# Altium PCB WX sat filter.PcbDoc
Units mm, origin at the board's own origin, x right, y up, seen from the top; angles counter-clockwise.
Board outline 18 x 18 mm, 2 copper layers (Top Layer, Bottom Layer); 7 components, 5 nets, 14 pads, 4 vias.
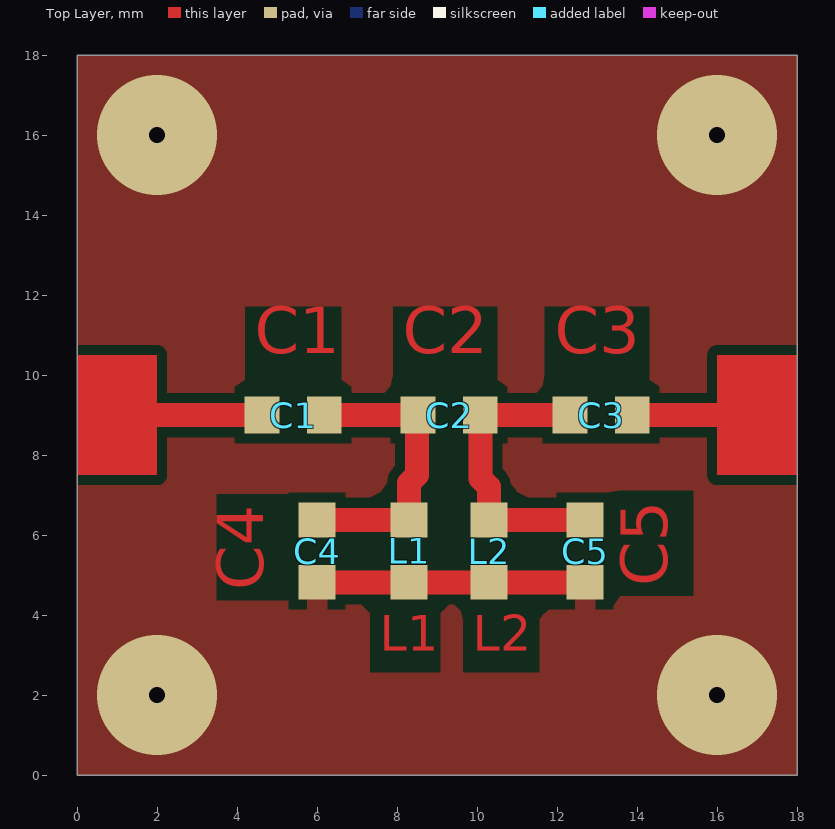
[diagram p0: Top Layer view]
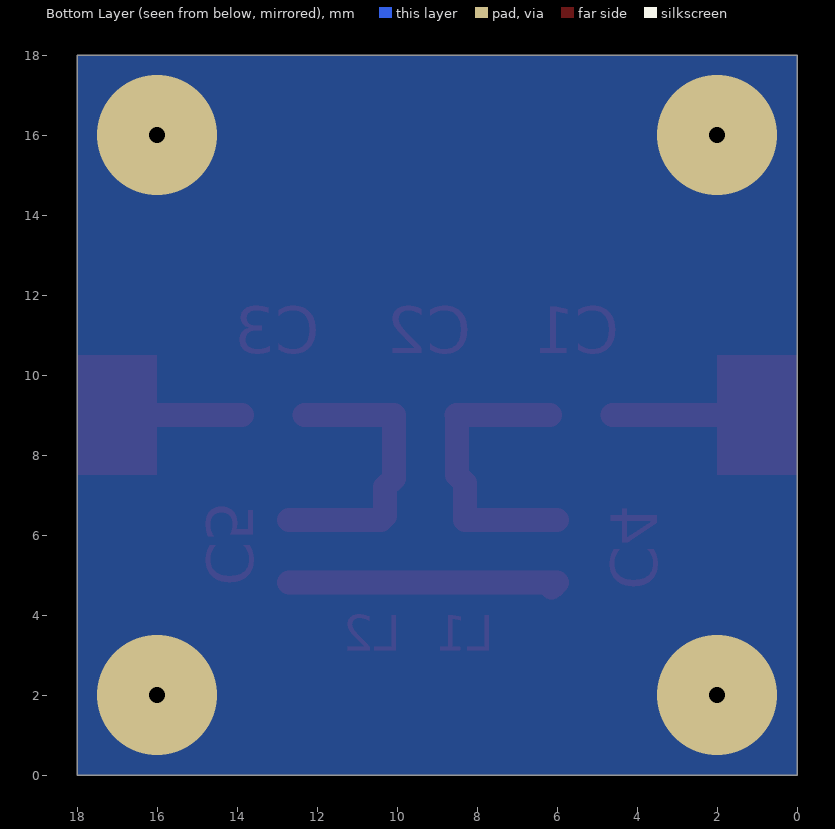
[diagram p1: Bottom Layer view, seen from below]
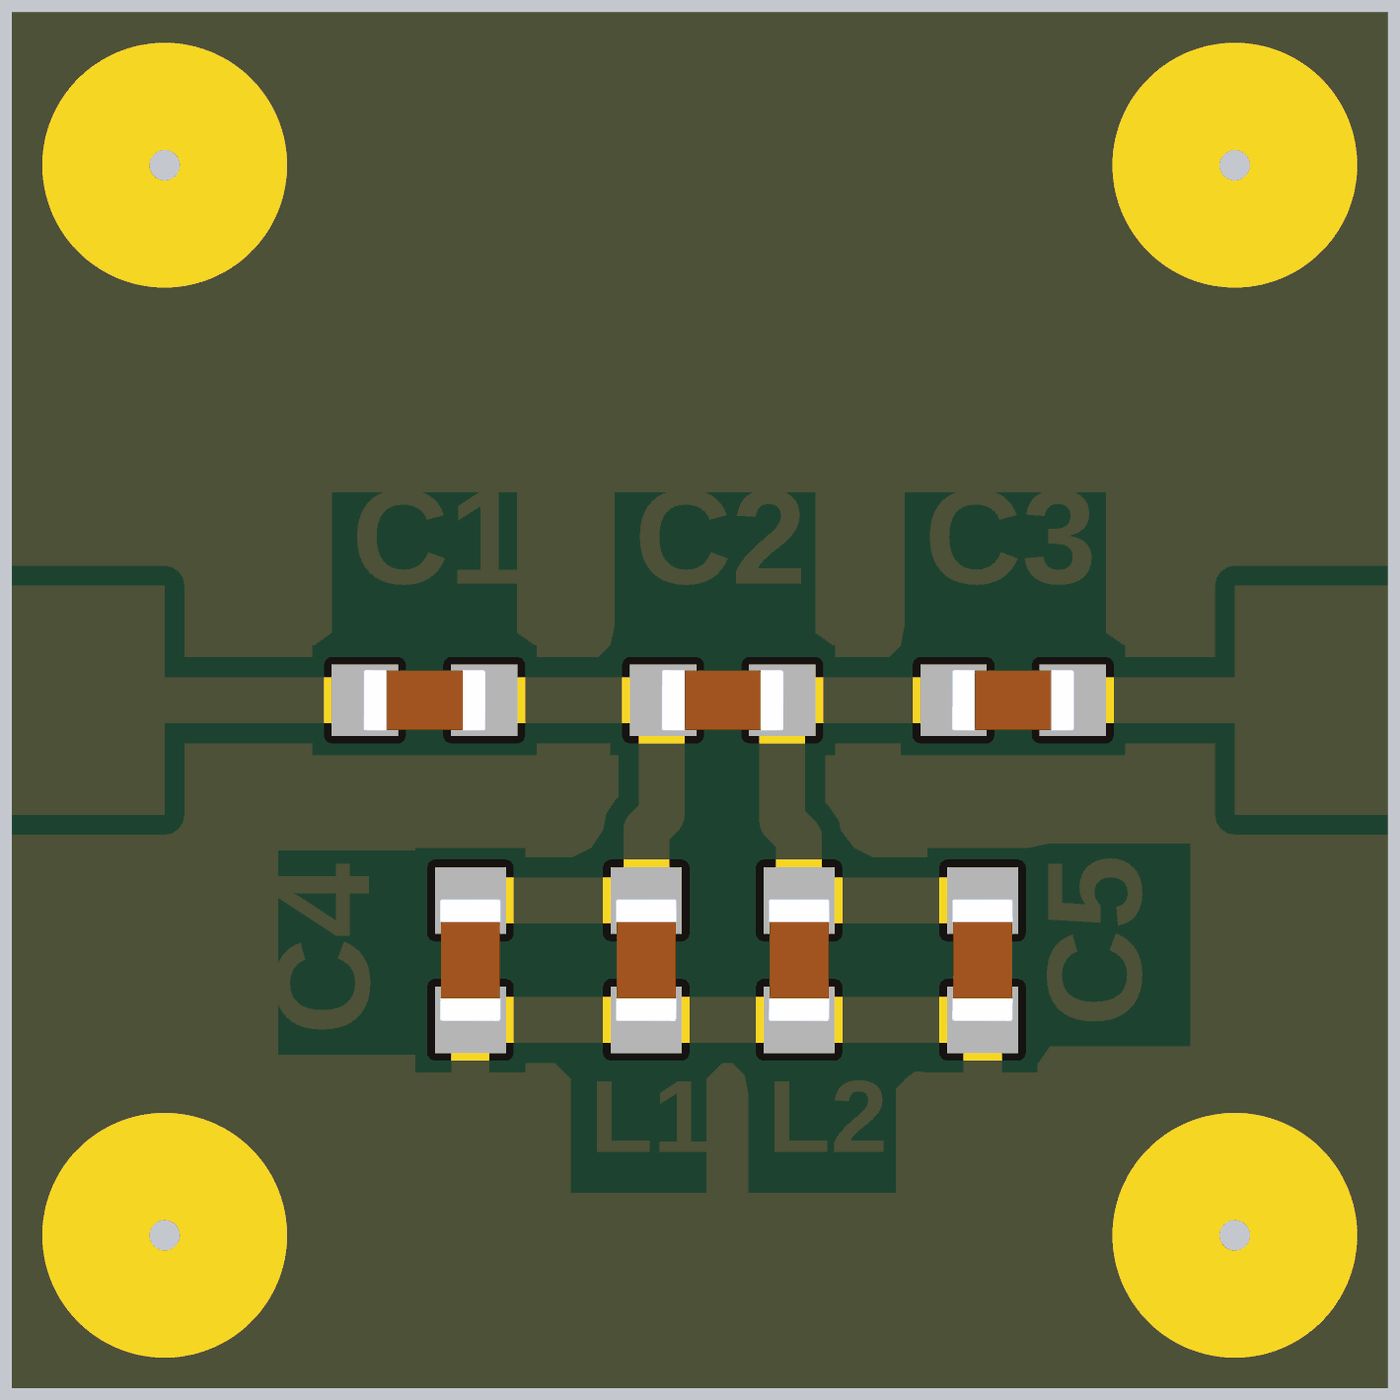
[diagram p2: 3D render of the assembled board from above, using the file's embedded part models]

## Layer stack, top to bottom
Top Solder: solder mask 0.0102, Solder Resist, Dk 3.5
Top Layer: signal copper 0.0356
Dielectric 1: dielectric 0.32, FR-4, Dk 4.8
Bottom Layer: signal copper 0.0356
Bottom Solder: solder mask 0.0102, Solder Resist, Dk 3.5

## Board outline
0,0 18,0 18,18 0,18

## Design rules (kind name [scope] priority, off if disabled: settings)
Clearance [All] p1: gap=0.254 ignorepadtopadclearanceinfootprint=FALSE except(0: Arc-Hole Track-Hole SMDPad-Hole THPad-Hole Via-Hole Fill-Hole Poly-Hole Region-Hole Text-Hole)
PlaneConnect [All] p1: planeconnectstyle=Direct reliefexpansion=0.508 reliefentries=4 reliefconductorwidth=0.254 reliefairgap=0.254
PolygonConnect [All] p1: thpad.connectstyle=Relief thpad.reliefconductorwidth=0.254 thpad.reliefentries=4 thpad.polygonreliefangle="90 Angle" thpad.airgapwidth=0.254 smdpad.connectstyle=Relief smdpad.reliefconductorwidth=0.5 smdpad.reliefentries=4 smdpad.polygonreliefangle="90 Angle" smdpad.airgapwidth=0.254 via.connectstyle=Direct via.reliefconductorwidth=0.254 via.reliefentries=4 via.polygonreliefangle="90 Angle" via.airgapwidth=0.254
RoutingVias [All] p1: holewidth=0.711 width=1.27 viastyle="Through Hole" minholewidth=0.711 minwidth=1.27 maxholewidth=0.711 maxwidth=1.27
SolderMaskExpansion [All] p1: expansion=0.102 istentingtop=FALSE
Width [All] p1: maxlimit=2 minlimit=0.254 preferedwidth=0.254
29 further rules are at their usual default settings.

## Components (designator, comment, footprint, x,y, rotation, side; value= is the part's Value field where it differs from the comment)
C1 "4p7" 0603_CAP 5.4,9 r0 top
C2 "1p" 0603_CAP 9.3,9 r0 top
C3 "4p7" 0603_CAP 13.1,9 r0 top
C4 "15p" 0603_CAP 6,5.6 r90 top
C5 "15p" 0603_CAP 12.7,5.6 r90 top
L1 "68n" 0603_CAP 8.3,5.6 r90 top
L2 "68n" 0603_CAP 10.3,5.6 r90 top

## Footprints (in the part's own frame and the unit in brackets; to place one, negate y for a bottom-side part, rotate by r counter-clockwise, add the part's x,y. Pads: shape width x height; smd on the part's side, far side on the other; paste and mask are expansions set on the pad)
0603_CAP [mm]
  rect 0.87x0.93 smd: 1(-0.78,0) 2(0.78,0)
  body extent -0.8,-0.4 0.8,0.4, height 0.45

## Part data
C1 C2 C3 C4 C5: library part CAP_0603_generic
L1 L2: library part IND_air_0603_generic

## Via types
v1: diameter 3, hole 0.4, Top Layer to Bottom Layer, 4 vias

## Nets (pads, with @x,y where several pads share a name; then routed paths per layer and width w, separated by ;. In a path a pad name is that pad's centre, name@x,y a point inside that pad or via, vN(x,y) a via of type N, cw(c..) or ccw(c..) an arc to the next point about the centre after c; other vN are vias at no path point)
GND: C4.1 C5.1 L1.1 L2.1 | length 6.9
  Top Layer w0.6: C4.1@6.135,4.685 C4.1 L1.1 L2.1 C5.1
  other v1: 2,2 16,2 2,16 16,16
NetC1_1: C1.1 | length 3.6
  Top Layer w0.6: 1,9 C1.1
NetC1_2: C1.2 C2.1 C4.2 L1.2 | length 7.4
  Top Layer w0.6: C4.2 L1.2 8.3,7.3 8.5,7.5 8.5,8.98 C2.1 C1.2
NetC2_2: C2.2 C3.1 C5.2 L2.2 | length 7.3
  Top Layer w0.6: C3.1 C2.2 10.08,7.42 10.3,7.2 10.3,6.48 10.4,6.38 C5.2
NetC3_2: C3.2 | length 3
  Top Layer w0.6: C3.2 16.9,9

## Polygon pours and split planes (outlines as drawn)
GND on Bottom Layer "GND_L02_P000" (solid, pour order 0): 0,0 0,18 18,18 18,0
GND on Top Layer "GND_L01_P002" (solid, remove dead copper, pour order 2): 0,18 0,0 18,0 18,18

## Other copper
Top Layer:
  rectangle net NetC3_2: 16,7.5 18,10.5
  rectangle net NetC1_1: 0,7.5 2,10.5